# Altium PCB cb_v0.PcbDoc
Units mm, origin at the board's own origin, x right, y up, seen from the top; angles counter-clockwise.
Board outline 75 x 45 mm, 2 copper layers (Top Layer, Bottom Layer); 31 components, 41 nets, 127 pads, 23 vias.
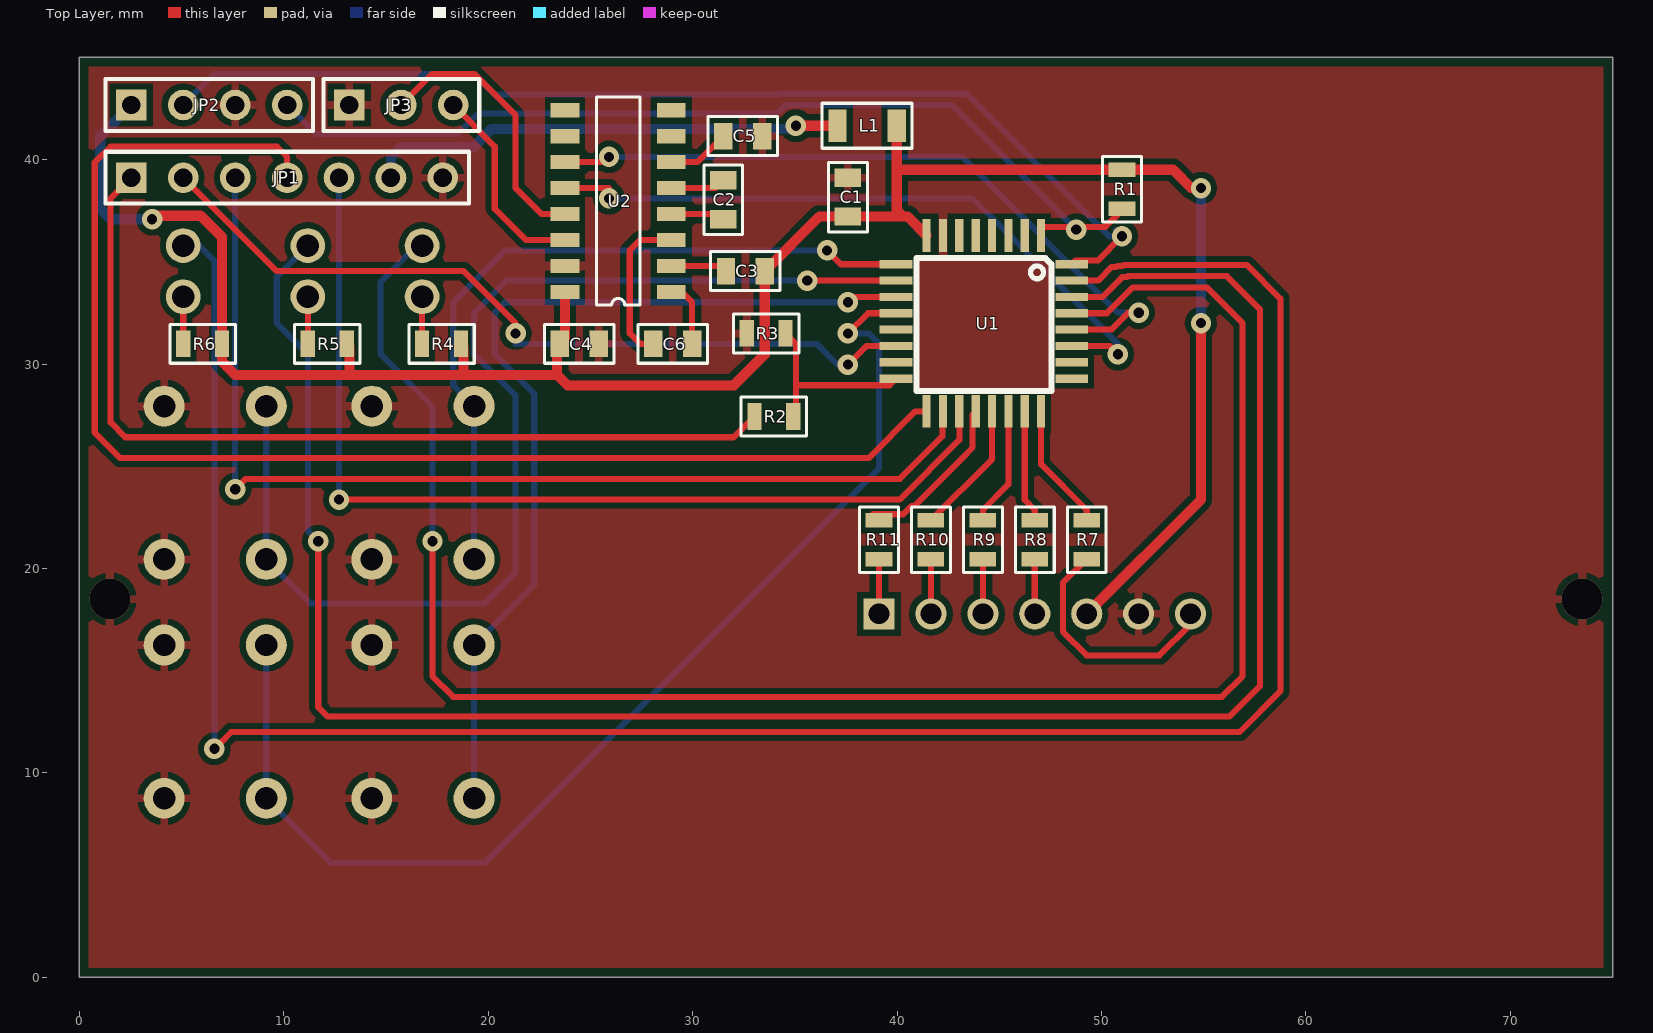
[diagram p0: Top Layer view]
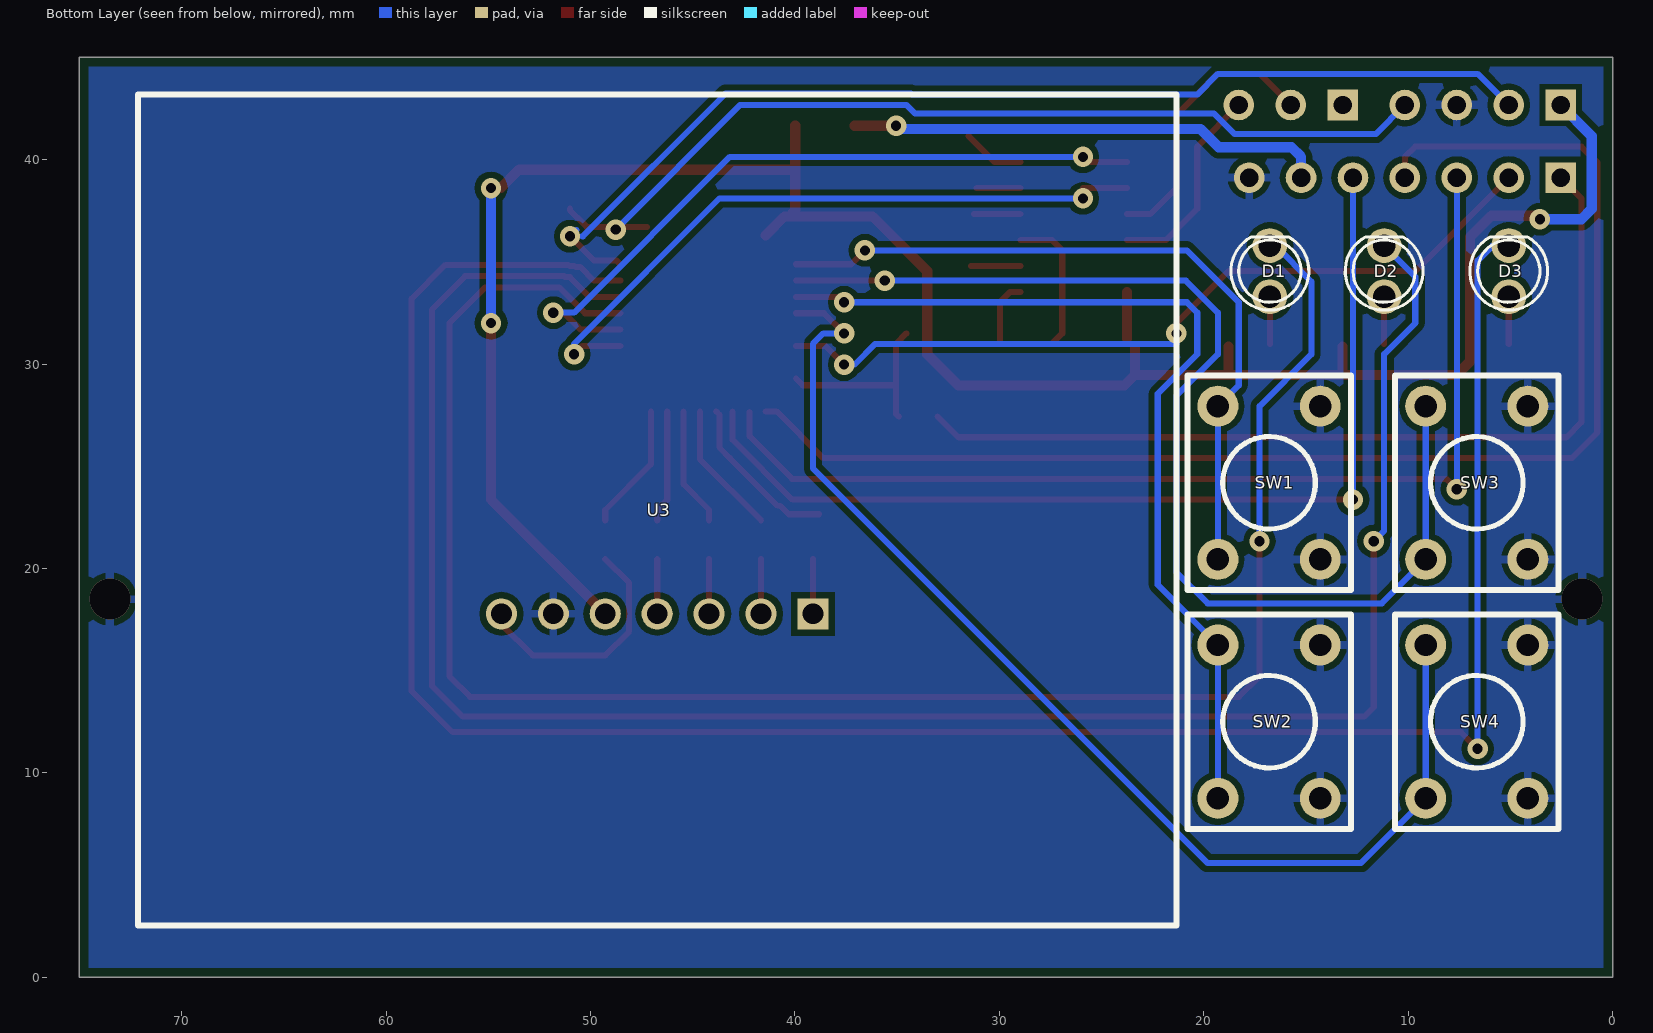
[diagram p1: Bottom Layer view, seen from below]

## Layer stack, top to bottom
Top Layer: signal copper 0.0356
Dielectric: dielectric 0.32, FR-4, Dk 4.8
Bottom Layer: signal copper 0.0356

## Board outline
0,0 75,0 75,45 0,45

## Design rules (kind name [scope] priority, off if disabled: settings)
Clearance Clearance_2 [InNamedPolygon('GND_B')] p1: gap=0.3
Clearance Clearance_1 [InNamedPolygon('GND_T')] p2: gap=0.3
Clearance [All] p3: gap=0.25
ComponentClearance [All] p1: gap=0.25 collisioncheckmode=3 verticalgap=0.25 showdistances=FALSE
HoleSize [All] p1: absolutevalues=TRUE maxlimit=5 minlimit=0.025 maxpercent=80.000 minpercent=20.000
HoleToHoleClearance [All] p1: gap=0.25 allowstackedmicrovias=TRUE
MinimumSolderMaskSliver [All] p1: minsoldermaskwidth=0
PlaneClearance [All] p1: clearance=0.5
PlaneConnect [All] p1: planeconnectstyle=Relief reliefexpansion=0.4 reliefentries=4 reliefconductorwidth=0.4 reliefairgap=0.25
PolygonConnect [All] p1: connectstyle=Relief reliefconductorwidth=0.4 reliefentries=4 polygonreliefangle="90 Angle"
RoutingCorners [All] p1: cornerstyle=45-Degree minsetback=1.25 maxsetback=1.25
RoutingVias [All] p1: holewidth=0.5 width=1 viastyle="Through Hole" minholewidth=0.4 minwidth=0.9 maxholewidth=0.7 maxwidth=1.25
SilkToSilkClearance [All] p1: silktosilkclearance=0
SilkscreenOverComponentPads [All] p1: minsilkscreentomaskgap=-1
SolderMaskExpansion [All] p1: expansion=0.1
Width [All] p1: maxlimit=2 minlimit=0.25 preferedwidth=0.3
19 further rules are at their usual default settings.

## Components (designator, comment, footprint, x,y, rotation, side; value= is the part's Value field where it differs from the comment)
C1 "100n" C-0805 37.592,39.116 r270 top
C2 "100n" C-0805 31.496,37.084 r90 top
C3 "100n" C-0805 33.528,34.544 r180 top
C4 "100n" C-0805 25.4,30.988 r180 top
C5 "100n" C-0805 31.496,41.148 r0 top
C6 "100n" C-0805 29.972,30.988 r180 top
D1 "RED" LED-DIP-1 16.764,34.544 r270 bottom
D2 "GREEN" LED-DIP-1 11.176,34.544 r270 bottom
D3 "YELLOW" LED-DIP-1 5.08,34.544 r270 bottom
JP1 "Header 7" HDR1X7 2.54,39.116 r0 top
JP2 "Header 4" HDR1X4 2.54,42.672 r0 top
JP3 "Header 3" HDR1X3 13.208,42.672 r0 top
L1 "SUPRESOR" R-1206 37.084,41.656 r0 top
R1 "22k" R-0805 51,39.5 r270 top
R2 "22k" R-0805 33.02,27.432 r0 top
R3 "22k" R-0805 34.544,31.496 r180 top
R4 "1k" R-0805 16.764,30.988 r0 top
R5 "1k" R-0805 11.176,30.988 r0 top
R6 "1k" R-0805 5.08,30.988 r0 top
R7 "1k" R-0805 49.276,22.352 r270 top
R8 "1k" R-0805 46.736,22.352 r270 top
R9 "1k" R-0805 44.196,22.352 r270 top
R10 "1k" R-0805 41.656,22.352 r270 top
R11 "1k" R-0805 39.116,22.352 r270 top
SW1 "SW-1" SW2mini 19.304,27.94 r270 bottom
SW2 "SW-1" SW2mini 19.304,16.256 r270 bottom
SW3 "SW-1" SW2mini 9.144,27.94 r270 bottom
SW4 "SW-1" SW2mini 9.144,16.256 r270 bottom
U1 "STM8L151K6T6" QFP32 47.244,37.084 r180 top
U2 "HIN202" SO16-(SOT-109-1) 28.956,33.528 r180 top
U3 "ECMA0896-1" ECMA0896 21.336,43.18 r0 bottom

## Footprints (in the part's own frame and the unit in brackets; to place one, negate y for a bottom-side part, rotate by r counter-clockwise, add the part's x,y. Pads: shape width x height; smd on the part's side, far side on the other; paste and mask are expansions set on the pad)
C-0805 [mm]
  rect 0.9x1.3 smd: 1(0,0) 2(1.9,0)
  silkscreen extent -0.75,-0.95 2.65,0.95
ECMA0896 [mil]
  rect 60x60 hole 40: 1(700,1000)
  round 60 hole 40: 2(800,1000) 3(900,1000) 4(1000,1000) 5(1100,1000) 6(1200,1000) 7(1300,1000)
  silkscreen extent 0,0 2000,1600
HDR1X3 [mm] "Connector; Header; 3 Position"
  rect 1.5x1.5 hole 0.9: 1(0,0)
  round 1.5 hole 0.9: 2(2.54,0) 3(5.08,0)
  silkscreen extent -1.27,-1.27 6.35,1.27
HDR1X4 [mm] "Connector; Header; 4 Position"
  rect 1.5x1.5 hole 0.9: 1(0,0)
  round 1.5 hole 0.9: 2(2.54,0) 3(5.08,0) 4(7.62,0)
  silkscreen extent -1.27,-1.27 8.89,1.27
HDR1X7 [mm] "Connector; Header; 7 Position"
  rect 1.5x1.5 hole 0.9: 1(0,0)
  round 1.5 hole 0.9: 2(2.54,0) 3(5.08,0) 4(7.62,0) 5(10.16,0) 6(12.7,0) 7(15.24,0)
  silkscreen extent -1.27,-1.27 16.51,1.27
LED-DIP-1 [mm]
  round 1.7 hole 1.1: A(1.25,0) K(-1.25,0)
  silkscreen extent -1.68,-1.9 1.91,1.9
QFP32 [mm]
  rect 0.4x1.6 smd: 1(0.2,0.8) 2(1,0.8) 3(1.8,0.8) 4(2.6,0.8) 5(3.4,0.8) 6(4.2,0.8) 7(5,0.8) 8(5.8,0.8) 17(5.8,9.4) 18(5,9.4) 19(4.2,9.4) 20(3.4,9.4) 21(2.6,9.4) 22(1.8,9.4) 23(1,9.4) 24(0.2,9.4)
  rect 1.6x0.4 smd: 9(7.3,2.2) 10(7.3,3) 11(7.3,3.8) 12(7.3,4.6) 13(7.3,5.4) 14(7.3,6.2) 15(7.3,7) 16(7.3,7.8) 25(-1.3,7.8) 26(-1.3,7) 27(-1.3,6.2) 28(-1.3,5.4) 29(-1.3,4.6) 30(-1.3,3.8) 31(-1.3,3) 32(-1.3,2.2)
  silkscreen extent -0.3,1.9 6.3,8.4
R-0805 [mm]
  rect 0.7x1.3 smd: 1(0,0) 2(1.9,0)
  silkscreen extent -0.65,-0.95 2.55,0.95
R-1206 [mm]
  rect 0.9x1.6 smd: 1(0,0) 2(2.9,0)
  silkscreen extent -0.75,-1.1 3.65,1.1
SO16-(SOT-109-1) [mm]
  rect 1.4x0.7 smd: 1(0,0) 2(0,-1.27) 3(0,-2.54) 4(0,-3.81) 5(0,-5.08) 6(0,-6.35) 7(0,-7.62) 8(0,-8.89) 9(5.2,-8.89) 10(5.2,-7.62) 11(5.2,-6.35) 12(5.2,-5.08) 13(5.2,-3.81) 14(5.2,-2.54) 15(5.2,-1.27) 16(5.2,0)
  silkscreen extent 1.54,-9.52 3.66,0.64
SW2mini [mm]
  round 2 hole 1.1: 1(0,0) 1(7.5,0) 2(0,5) 2(7.5,5)
  silkscreen extent -1.5,-1.5 9,6.5

## Part data
C1 C2 C3 C4 C5 C6: library part C
D1 D2 D3: library part LED
JP1: "Header, 7-Pin"
JP2: "Header, 4-Pin"
JP3: "Header, 3-Pin"
R1 R2 R3 R4 R5 R6 R7 R8 R9 R10 R11: library part R
U1: library part STM32L151
U2: "RS232 driver"
U3: library part ECMA0896

## Via types
v1: diameter 1, hole 0.5, Top Layer to Bottom Layer, 20 vias
v2: diameter 2, hole 2, Top Layer to Bottom Layer, 2 vias
v3: diameter 1, hole 0.5, Top Layer to Bottom Layer, tented bottom, 1 vias

## Nets (pads, with @x,y where several pads share a name; then routed paths per layer and width w, separated by ;. In a path a pad name is that pad's centre, name@x,y a point inside that pad or via, vN(x,y) a via of type N, cw(c..) or ccw(c..) an arc to the next point about the centre after c; other vN are vias at no path point)
A0: R11.1 U1.20 | length 7.9
  Top Layer w0.3: R11.1@38.818,22.65 40.3,22.65 40.7,23.05 ; 40.85,23.079 40.859,23.079 43.18,25.4 43.688,25.908 43.688,27.528 U1.20
CS: R10.1 U1.21 | length 6.6
  Top Layer w0.3: R10.1 44.644,25.34 U1.21
EN: JP1.4 U1.17 | length 66.3
  Top Layer w0.3: JP1.4 10.16,40.132 9.652,40.64 1.524,40.64 0.75,39.866 0.75,26.65 2,25.4 38.608,25.4 40.892,27.684 U1.17
GND: C1.1 C4.1 C5.2 JP1.7 JP2.3 JP3.1 R3.2 SW1.2 SW2.2 SW3.2 SW4.2 U1.7 U2.15 U3.6
  other v2: 1.5,18.5 73.5,18.5
LED1: D1.K U1.29 | length 90.5
  Top Layer w0.3: v3(17.272,21.336) 17.272,14.732 18.288,13.716 55.88,13.716 56.896,14.732 56.896,32.004 55.15,33.75 51.928,33.75 51.53,33.75 50.264,32.484 U1.29
  Bottom Layer w0.3: D1.K 16.49,35.794 14.732,34.036 14.732,30.48 17.272,27.94 v3(17.272,21.336)
LED2: D2.K U1.30 | length 99.7
  Top Layer w0.3: v1(11.684,21.336) 11.684,13.208 12.142,12.75 56.25,12.75 57.75,14.25 57.75,32.674 56.124,34.3 51.7,34.3 51.302,34.3 51.252,34.25 51.014,34.25 50.048,33.284 U1.30
  Bottom Layer w0.3: D2.K 9.652,34.27 9.652,32.004 11.176,30.48 11.176,21.844 v1(11.684,21.336)
LED3: D3.K U1.31 | length 109.4
  Top Layer w0.3: v1(6.604,11.176) 6.928,11.5 7.428,12 56.75,12 58.75,14 58.75,33.198 57.098,34.85 51.472,34.85 51.074,34.85 51.024,34.8 50.786,34.8 50.736,34.75 50.498,34.75 49.832,34.084 U1.31
  Bottom Layer w0.3: D3.K 5.862,35.794 6.604,35.052 v1(6.604,11.176)
NetC2_1: C2.1 U2.4 | length 2.3
  Top Layer w0.3: U2.4 C2.1@31.242,37.338
NetC2_2: C2.2 U2.5 | length 2.2
  Top Layer w0.3: U2.5 C2.2@31.12,38.608
NetC3_2: C3.2 U2.2 | length 2.4
  Top Layer w0.3: U2.2 C3.2@31.374,34.798
NetC5_1: C5.1 U2.6 | length 3.1
  Top Layer w0.3: U2.6 30.226,39.878 C5.1
NetC6_1: C6.1 U2.1 | length 3.3
  Top Layer w0.3: U2.1 29.464,33.528 29.972,33.02 C6.1
NetC6_2: C6.2 U2.3 | length 7.7
  Top Layer w0.3: C6.2 27.432,30.988 26.924,31.496 26.924,35.56 27.432,36.068 U2.3
NetD1_A: D1.A R4.1 | length 2.3
  Top Layer w0.3: R4.1 D1.A
NetD2_A: D2.A R5.1 | length 2.3
  Top Layer w0.3: R5.1 D2.A
NetD3_A: D3.A R6.1 | length 2.3
  Top Layer w0.3: R6.1 D3.A
NetJP1_6: JP1.6 L1.1 | length 23.5
  Top Layer w0.5: v1(35.052,41.656) L1.1
  Bottom Layer w0.5: JP1.6 15.24,40.132 15.708,40.6 19.264,40.6 20.164,41.5 34.896,41.5 v1(35.052,41.656)
NetR2_2: R2.2 R3.1 U1.16 | length 9.4
  Top Layer w0.3: R3.1 35.052,30.988 35.052,29.464 35.052,27.564 R2.2 ; 35.052,28.964 39.624,28.964 U1.16
NetR7_2: R7.2 U3.7 | length 11.9
  Top Layer w0.3: R7.2 48.114,19.29 48.114,16.91 49.276,15.748 52.832,15.748 54.356,17.272 U3.7
NetR8_2: R8.2 U3.4 | length 2.7
  Top Layer w0.3: U3.4 R8.2
NetR9_2: R9.2 U3.3 | length 2.7
  Top Layer w0.3: U3.3 R9.2
NetR10_2: R10.2 U3.2 | length 2.7
  Top Layer w0.3: U3.2 R10.2
NetR11_2: R11.2 U3.1 | length 2.7
  Top Layer w0.3: U3.1 R11.2
NetSW1_1: SW1.1 U1.9 | length 36
  Top Layer w0.3: v1(36.576,35.56) 37.252,34.884 U1.9
  Bottom Layer w0.3: SW1.1@19.304,20.44 19.304,27.94 18.288,28.956 18.288,33.02 20.828,35.56 v1(36.576,35.56)
NetSW2_1: SW2.1 U1.11 | length 45.3
  Top Layer w0.3: v1@37.856,33.284 U1.11
  Bottom Layer w0.3: SW2.1@19.304,8.756 19.304,16.256 22.252,19.204 22.252,28.548 20.32,30.48 20.32,32.512 20.828,33.02 v1(37.592,33.02)
NetSW3_1: SW3.1 U1.10 | length 56
  Top Layer w0.3: v1(35.608,34.084) U1.10
  Bottom Layer w0.3: SW3.1@9.144,27.94 9.144,20.44 11.296,18.288 19.812,18.288 21.336,19.812 21.336,28.448 19.304,30.48 19.304,32.512 20.876,34.084 v1(35.608,34.084)
NetSW4_1: SW4.1 U1.12 | length 57.4
  Top Layer w0.3: v1(37.592,31.496) 38.58,32.484 U1.12
  Bottom Layer w0.3: SW4.1@9.144,16.256 9.144,8.756 12.312,5.588 19.812,5.588 39.116,24.892 39.116,30.988 38.608,31.496 v1(37.592,31.496)
PWM: JP1.2 U1.14 | length 39.6
  Top Layer w0.3: JP1.2 9.652,34.544 18.796,34.544 21.336,32.004 v1(21.336,31.496) ; v1(37.592,29.972) 38.504,30.884 U1.14
  Bottom Layer w0.3: v1(21.336,31.496) 21.336,30.988 36.068,30.988 37.084,29.972 v1(37.592,29.972)
RESETLCD: R7.1 U1.24 | length 6.3
  Top Layer w0.3: U1.24 47.044,25.092 49.276,22.86 R7.1
REVERSE: JP1.3 U1.18 | length 52.1
  Top Layer w0.3: v1(7.62,23.876) 8.128,24.384 40.134,24.384 42.213,26.463 U1.18@42.213,27.653
  Bottom Layer w0.3: v1(7.62,23.876) JP1.3
RST: JP2.4 R1.2 U1.1 | length 46.5
  Top Layer w0.3: 47.244,36.708 50.185,36.708 50.627,37.15 50.642,37.15 51,37.508 R1.2
  Bottom Layer w0.3: JP2.4 11.582,41.25 18.492,41.25 19.492,42.25 34.122,42.25 34.544,42.672 42.672,42.672 v1(48.768,36.576)
RXD0: U1.27 U2.12 | length 32.9
  Top Layer w0.3: U2.12 25.908,38.608 ; U1.27 50.396,30.884 v1(50.8,30.48)
  Bottom Layer w0.3: v1(25.908,38.1) 43.688,38.1 50.8,30.988 v1(50.8,30.48)
RXD232: JP3.2 U2.13 | length 13.6
  Top Layer w0.3: JP3.2 17.272,44.196 19.304,44.196 21.336,42.164 21.336,38.608 22.606,37.338 U2.13
SCLK: R8.1 U1.23 | length 5.5
  Top Layer w0.3: U1.23 46.244,23.352 46.736,22.86 R8.1
SDATA: R9.1 U1.22 | length 5.8
  Top Layer w0.3: R9.1 44.196,22.86 45.444,24.108 U1.22
SENSE: JP1.1 R2.1 | length 44.6
  Top Layer w0.3: JP1.1 1.524,38.1 1.524,27.142 2.25,26.416 32.004,26.416 R2.1
SWIM: JP2.2 U1.32 | length 52.7
  Top Layer w0.3: U1.32 48.722,35.062 49.812,35.062 v1(51,36.25)
  Bottom Layer w0.3: JP2.2 6.604,44.196 19.304,44.196 20.32,43.18 34.274,43.18 34.316,43.222 43.395,43.222 50.367,36.25 50.383,36.25 ; v1@50.692,36.558 v1(51,36.25)
TXD0: U1.28 U2.11 | length 34.9
  Top Layer w0.3: U2.11 25.654,39.878 v1(25.908,40.132) ; U1.28 50.48,31.684 51.308,32.512 v1(51.816,32.512)
  Bottom Layer w0.3: v1(25.908,40.132) 43.18,40.132 50.8,32.512 v1(51.816,32.512)
TXD232: JP3.3 U2.14 | length 10
  Top Layer w0.3: JP3.3 20.32,40.64 20.32,37.592 21.844,36.068 U2.14
V_CONT: JP1.5 U1.19 | length 48.7
  Top Layer w0.3: v1(12.7,23.368) 40.118,23.368 43.044,26.294 U1.19
  Bottom Layer w0.3: v1(12.7,23.368) JP1.5
VCC: C1.2 C3.1 C4.2 JP2.1 L1.2 R1.1 R4.2 R5.2 R6.2 U1.8 U2.16 U3.5 | length 109.1
  Top Layer w0.5: v1(3.556,37.084) 3.722,37.25 5.93,37.25 6.98,36.2 R6.2 6.98,30.104 7.62,29.464 13.208,29.464 ; R5.2@13.208,30.856 13.208,29.464 ; R4.2@18.796,30.856 18.796,29.464 ; C4.2@23.368,30.856 23.368,29.464 ; C4.2@23.756,31.244 U2.16 ; L1.2 39.984,39.5 ; 40.132,37.38 39.984,37.232 39.984,39.5 ; U1.8 40.512,37.216 C1.2 36.2,37.216 C3.1 33.528,30.48 32.004,28.956 23.876,28.956 23.368,29.464 ; U3.5 54.864,23.368 v1(54.864,32.004) ; v1(54.864,38.608) 54.392,38.608 53.5,39.5 R1.1 39.984,39.5 ; 13.208,29.464 18.796,29.464 ; 18.796,29.464 23.368,29.464
  Bottom Layer w0.5: JP2.1 1.016,41.148 1.016,37.592 1.524,37.084 v1(3.556,37.084) ; v1(54.864,32.004) v1(54.864,38.608)
pads on no net: U1.2 U1.3 U1.4 U1.5 U1.6 U1.13 U1.15 U1.25 U1.26 U2.7 U2.8 U2.9 U2.10

## Polygon pours and split planes (outlines as drawn)
GND on Top Layer "GND_T" (solid, remove dead copper, pour order 1000): 0,0 75,0 75,45 0,45
GND on Bottom Layer "GND_B" (solid, remove dead copper, pour order 1001): 0,0 75,0 75,45 0,45

## Silkscreen, mask and mechanical layers (free items; w line width, h text height)
Mechanical 1:
  the board outline again, w0.3